# EAGLE board gesture_control_robot_tx (EAGLE 6.1)
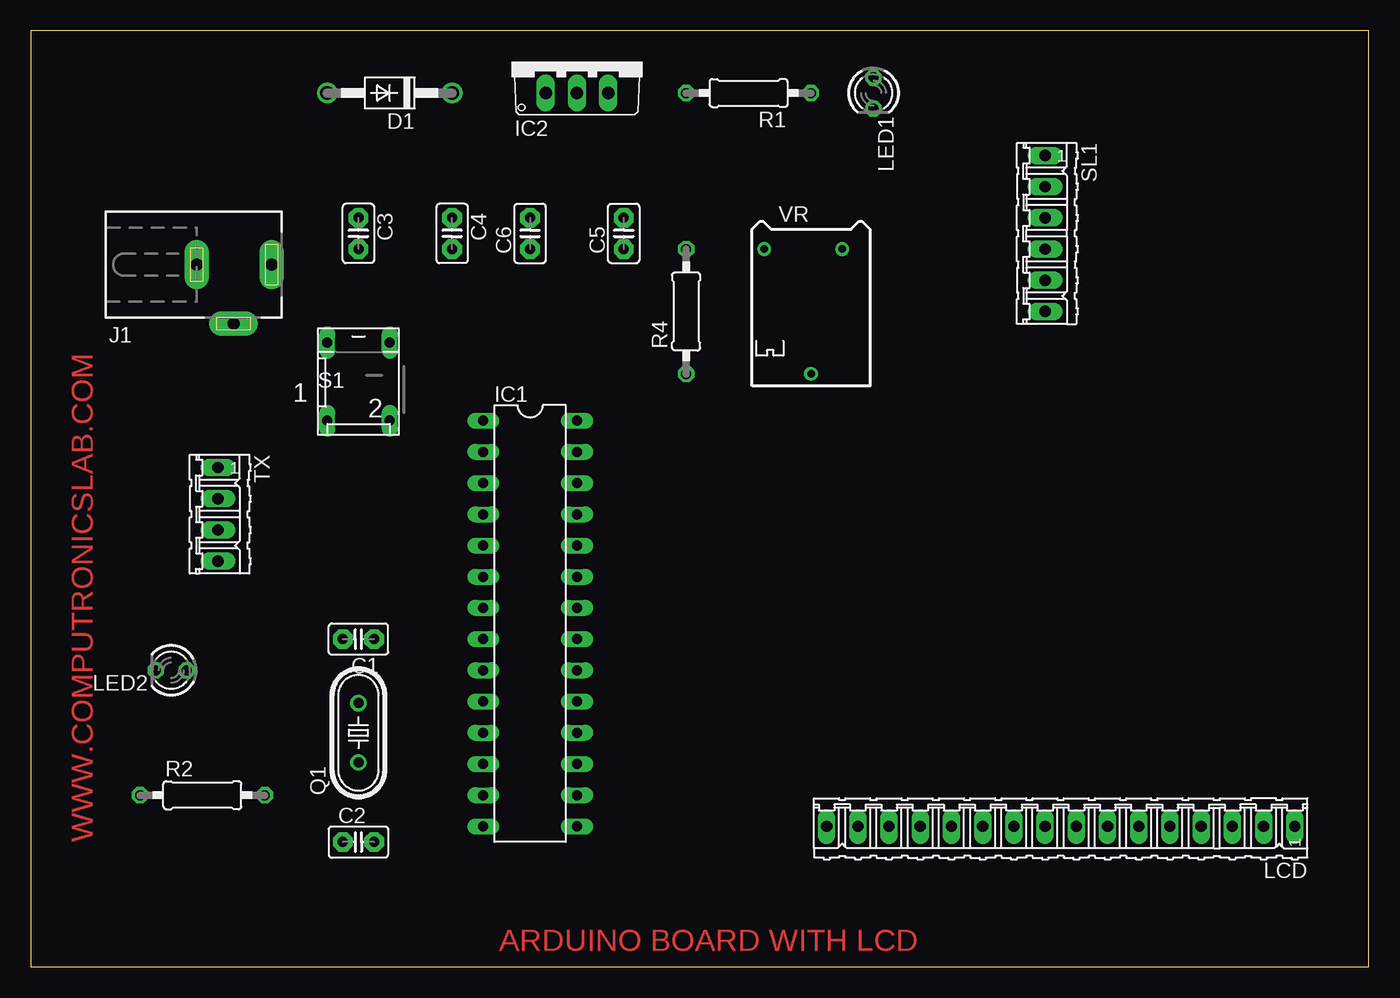
[diagram p0: board, top side]
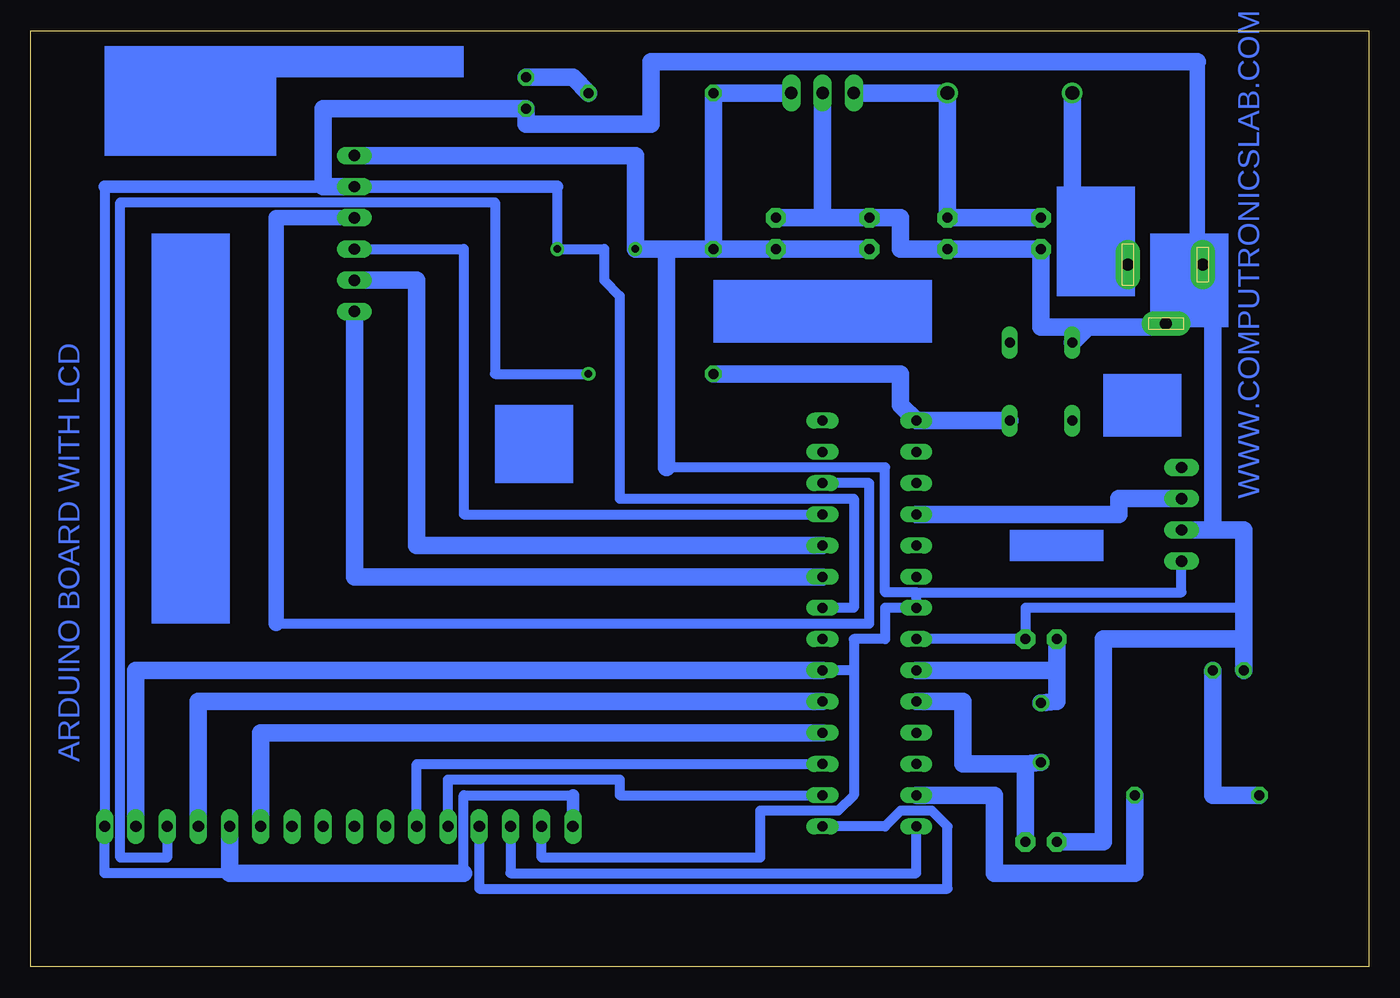
[diagram p1: board, bottom side, seen from below]

Size 108.89 x 76.19 mm. Coordinates in mm from the lower left corner, seen from the top.
Outline: 0,0 108.89,0 108.89,76.19 0,76.19 0,0
Copper layers (1*16): Top 0.035mm / dielectric 1.5mm / Bottom 0.035mm
Design rules: minimum track width 20mil, minimum drill 24mil, track to track 8mil, track to pad 8mil, pad to pad 8mil, via to via 8mil, smd to smd 8mil, copper to edge 40mil, drill to drill 8mil, minimum pad ring 10mil, minimum via ring 8mil, stop-mask expansion 4mil, vias tented up to drill 0mil, thermal gap 10mil

## Footprints (pad centres in the part's own frame; a part is rotated, then mirrored left to right if it is on the bottom)
C2.5-2 = drill 0.813 pad 1.6 octagon: 1 -1.27,0; 2 1.27,0
DO41-10 = drill 1.118: A 5.08,0; C -5.08,0
DIL28-3 = drill 0.813 long: 1 -16.51,-3.81; 2 -13.97,-3.81; 3 -11.43,-3.81; 4 -8.89,-3.81; 5 -6.35,-3.81; 6 -3.81,-3.81; 7 -1.27,-3.81; 8 1.27,-3.81; 9 3.81,-3.81; 10 6.35,-3.81; 11 8.89,-3.81; 12 11.43,-3.81; 13 13.97,-3.81; 14 16.51,-3.81; 15 16.51,3.81; 16 13.97,3.81; 17 11.43,3.81; 18 8.89,3.81; 19 6.35,3.81; 20 3.81,3.81; 21 1.27,3.81; 22 -1.27,3.81; 23 -3.81,3.81; 24 -6.35,3.81; 25 -8.89,3.81; 26 -11.43,3.81; 27 -13.97,3.81; 28 -16.51,3.81
TO220V = drill 1.016 long: 1 -2.54,-2.54; 2 0,-2.54; 3 2.54,-2.54
DCJ0303 = drill 1 pad 2 long: 1 0,3.1; 2 4.8,0; 3 0,-3
16P = drill 0.914 long: 1 -19.05,0; 2 -16.51,0; 3 -13.97,0; 4 -11.43,0; 5 -8.89,0; 6 -6.35,0; 7 -3.81,0; 8 -1.27,0; 9 1.27,0; 10 3.81,0; 11 6.35,0; 12 8.89,0; 13 11.43,0; 14 13.97,0; 15 16.51,0; 16 19.05,0
LED3MM = drill 0.813 octagon: A -1.27,0; K 1.27,0
HC49/S = drill 0.813: 1 -2.413,0; 2 2.413,0
0207/10 = drill 0.813 octagon: 1 -5.08,0; 2 5.08,0
DP-02 = drill 0.813 long: 1 -2.54,-2.54; 2 2.54,-2.54; 3 2.54,3.81; 4 -2.54,3.81
06P = drill 0.914 long: 1 -6.35,0; 2 -3.81,0; 3 -1.27,0; 4 1.27,0; 5 3.81,0; 6 6.35,0
04P = drill 0.914 long: 1 -3.81,0; 2 -1.27,0; 3 1.27,0; 4 3.81,0
RTRIM64P = drill 0.61: 1 -2.54,-3.81; 2 7.62,0; 3 -2.54,2.54

## Placement (x,y rotation side)
C1  22pf  [C2.5-2]  26.67,26.67 180 top
C2  22pf  [C2.5-2]  26.67,10.16 0 top
C3  100UF  [C2.5-2]  26.67,59.69 270 top
C4  0.1uf  [C2.5-2]  34.29,59.69 270 top
C5  0.1uf  [C2.5-2]  48.26,59.69 90 top
C6  4.7uf  [C2.5-2]  40.64,59.69 90 top
D1  1N4007  [DO41-10]  29.21,71.12 180 top
IC1  ATMEGA328  [DIL28-3]  40.64,27.94 270 top
IC2  7805  [TO220V]  44.45,73.66 0 top
J1  [DCJ0303]  16.51,57.15 270 top
LCD  [16P]  83.82,11.43 180 top
LED1  [LED3MM]  68.58,71.12 270 top
LED2  [LED3MM]  11.43,24.13 180 top
Q1  16MHZ  [HC49/S]  26.67,19.05 90 top
R1  220R  [0207/10]  58.42,71.12 180 top
R2  330R  [0207/10]  13.97,13.97 0 top
R4  10K  [0207/10]  53.34,53.34 90 top
S1  [DP-02]  26.67,46.99 0 top
SL1  ACCELEROMETER  [06P]  82.55,59.69 270 top
TX  [04P]  15.24,36.83 270 top
VR  100k  [RTRIM64P]  63.5,55.88 270 top

## Library data of the parts
C1-C6 = capacitor-wima
D1 = diode
IC1 = quantum-research-group; OC_FARNELL: unknown; OC_NEWARK: unknown
IC2 = linear
J1 = con-jack; OC_FARNELL: unknown; OC_NEWARK: unknown
LCD SL1 TX = con-amp-quick; OC_FARNELL: unknown; OC_NEWARK: unknown
LED1 LED2 = led
Q1 = crystal; OC_FARNELL: 1667008; OC_NEWARK: unknown
R1 R2 R4 = rcl
S1 = switch-dil; MPN: MCDP02; OC_FARNELL: 1255233; OC_NEWARK: 26M1095
VR = resistor

## Nets
N$1: C1.2 IC1.9 Q1.2
N$2: C2.2 IC1.10 Q1.1
N$3: D1.A J1.1
N$4: C5.1 C6.1 IC1.7 IC1.20 IC2.3 LCD.2 LCD.15 R1.2 R4.2 SL1.1 TX.4 VR.1
N$5: C1.1 C2.1 C3.2 C4.2 C5.2 C6.2 IC1.8 IC1.22 IC2.2 J1.2 J1.3 LCD.1 LCD.5 LCD.16 LED1.K LED2.K S1.4 SL1.2 TX.3 VR.3
N$6: LED1.A R1.1
N$7: C3.1 C4.1 D1.C IC2.1
N$8: IC1.23 SL1.6
N$9: IC1.24 SL1.5
N$10: IC1.25 SL1.4
N$11: IC1.26 SL1.3
N$12: IC1.3
N$13: IC1.4 TX.2
N$21: IC1.13 R2.2
N$22: LCD.3 VR.2
N$23: IC1.19 LCD.4
N$24: IC1.18 LCD.6
N$25: IC1.17 LCD.11
N$26: IC1.16 LCD.12
N$27: IC1.15 LCD.13
N$29: IC1.14 LCD.14
N$31: IC1.1 R4.1 S1.2
N$32: LED2.A R2.1

## Tracks (layer width: path | path; a pad name or v marks a point on that pad's centre or on a via)
N$1
  Bottom 1.422: C1.2 25.4,24.13 | Q1.2 25.4,21.59 25.4,24.13 | 25.4,24.13 IC1.9
N$2
  Bottom 1.422: C2.2 27.94,16.51 | IC1.10 33.02,21.59 33.02,16.51 27.94,16.51 | 27.94,16.51 Q1.1
N$3
  Bottom 1.422: D1.A 24.13,57.15 J1.1
N$4
  Bottom 0.813: 41.91,24.13 41.91,26.67 39.37,26.67 39.37,29.21 IC1.7 36.83,30.48 | 41.91,24.13 IC1.20 | TX.4 15.24,30.48 36.83,30.48 | LCD.15 67.31,8.89 49.53,8.89 49.53,12.7 43.18,12.7 41.91,13.97 41.91,24.13 | 57.15,40.64 39.37,40.64 39.37,30.48 36.83,30.48
  Bottom 1.422: C6.1 C5.1 R4.2 | IC2.3 R1.2 R4.2 | R4.2 57.15,58.42 | 57.15,58.42 VR.1 59.69,66.04 SL1.1 | LCD.2 100.33,24.13 IC1.20 | 57.15,40.64 57.15,58.42
N$5
  Bottom 0.508: 16.51,52.07 J1.2 16.51,53.34 | 13.97,53.34 12.7,53.34 | 13.97,57.15 J1.3
  Bottom 0.813: IC1.8 C1.1 27.94,29.21 10.16,29.21 | 64.77,13.97 73.66,13.97 73.66,7.62 | 92.71,7.62 102.87,7.62 LCD.1 102.87,63.5 | 66.04,63.5 VR.3 62.23,58.42 62.23,55.88 60.96,54.61 60.96,38.1 41.91,38.1 41.91,29.21 IC1.22
  Bottom 1.016: 64.77,13.97 LCD.16 | SL1.2 66.04,63.5 | 85.09,63.5 102.87,63.5
  Bottom 1.27: 13.97,73.66 13.97,57.15
  Bottom 1.422: 10.16,26.67 10.16,29.21 10.16,35.56 12.7,35.56 | 10.16,26.67 LED2.K | TX.3 12.7,35.56 | C2.1 21.59,10.16 21.59,26.67 10.16,26.67 | 22.86,52.07 S1.4 | 16.51,52.07 22.86,52.07 | 13.97,57.15 13.97,53.34 16.51,53.34 | 44.45,60.96 IC2.2 | 44.45,60.96 C6.2 38.1,60.96 38.1,58.42 C4.2 C3.2 26.67,52.07 22.86,52.07 | 44.45,60.96 C5.2 | 12.7,53.34 12.7,35.56 | 73.66,7.62 92.71,7.62 LCD.5 | SL1.2 85.09,63.5 85.09,69.85 LED1.K 68.58,68.58 58.42,68.58 58.42,73.66 13.97,73.66
N$6
  Bottom 1.422: R1.1 64.77,72.39 LED1.A
N$7
  Bottom 1.422: C3.1 C4.1 D1.C IC2.1
N$8
  Bottom 1.422: IC1.23 82.55,31.75 SL1.6
N$9
  Bottom 1.422: IC1.24 77.47,34.29 77.47,55.88 SL1.5
N$10
  Bottom 0.813: IC1.25 73.66,36.83 73.66,58.42 SL1.4
N$11
  Bottom 0.813: IC1.26 40.64,39.37 40.64,27.94 88.9,27.94
  Bottom 1.27: 88.9,27.94 88.9,60.96 SL1.3
N$13
  Bottom 1.422: IC1.4 20.32,36.83 20.32,38.1 TX.2
N$21
  Bottom 1.422: R2.2 19.05,7.62 30.48,7.62 30.48,13.97 IC1.13
N$22
  Bottom 0.813: VR.2 71.12,48.26 71.12,62.23 101.6,62.23 101.6,8.89 97.79,8.89 LCD.3
N$23
  Bottom 1.422: IC1.19 95.25,21.59 LCD.4
N$24
  Bottom 1.422: IC1.18 90.17,19.05 LCD.6
N$25
  Bottom 0.813: IC1.17 77.47,16.51 LCD.11
N$26
  Bottom 0.813: IC1.16 60.96,13.97 60.96,15.24 74.93,15.24 LCD.12
N$27
  Bottom 0.813: IC1.15 39.37,11.43 38.1,12.7 35.56,12.7 34.29,11.43 34.29,6.35 72.39,6.35 LCD.13
N$29
  Bottom 0.813: IC1.14 36.83,7.62 69.85,7.62 LCD.14
N$31
  Bottom 1.422: S1.2 IC1.1 38.1,45.72 38.1,48.26 R4.1
N$32
  Bottom 1.422: R2.1 12.7,13.97 LED2.A
(copper drawn outside any net)
  shapes: Bottom area x10

## Text on the board
Top: WWW.COMPUTRONICSLAB.COM | ARDUINO BOARD WITH LCD
Bottom: ARDUINO BOARD WITH LCD | WWW.COMPUTRONICSLAB.COM